# EAGLE board expansion_can_rev_B (EAGLE 6.6.0)
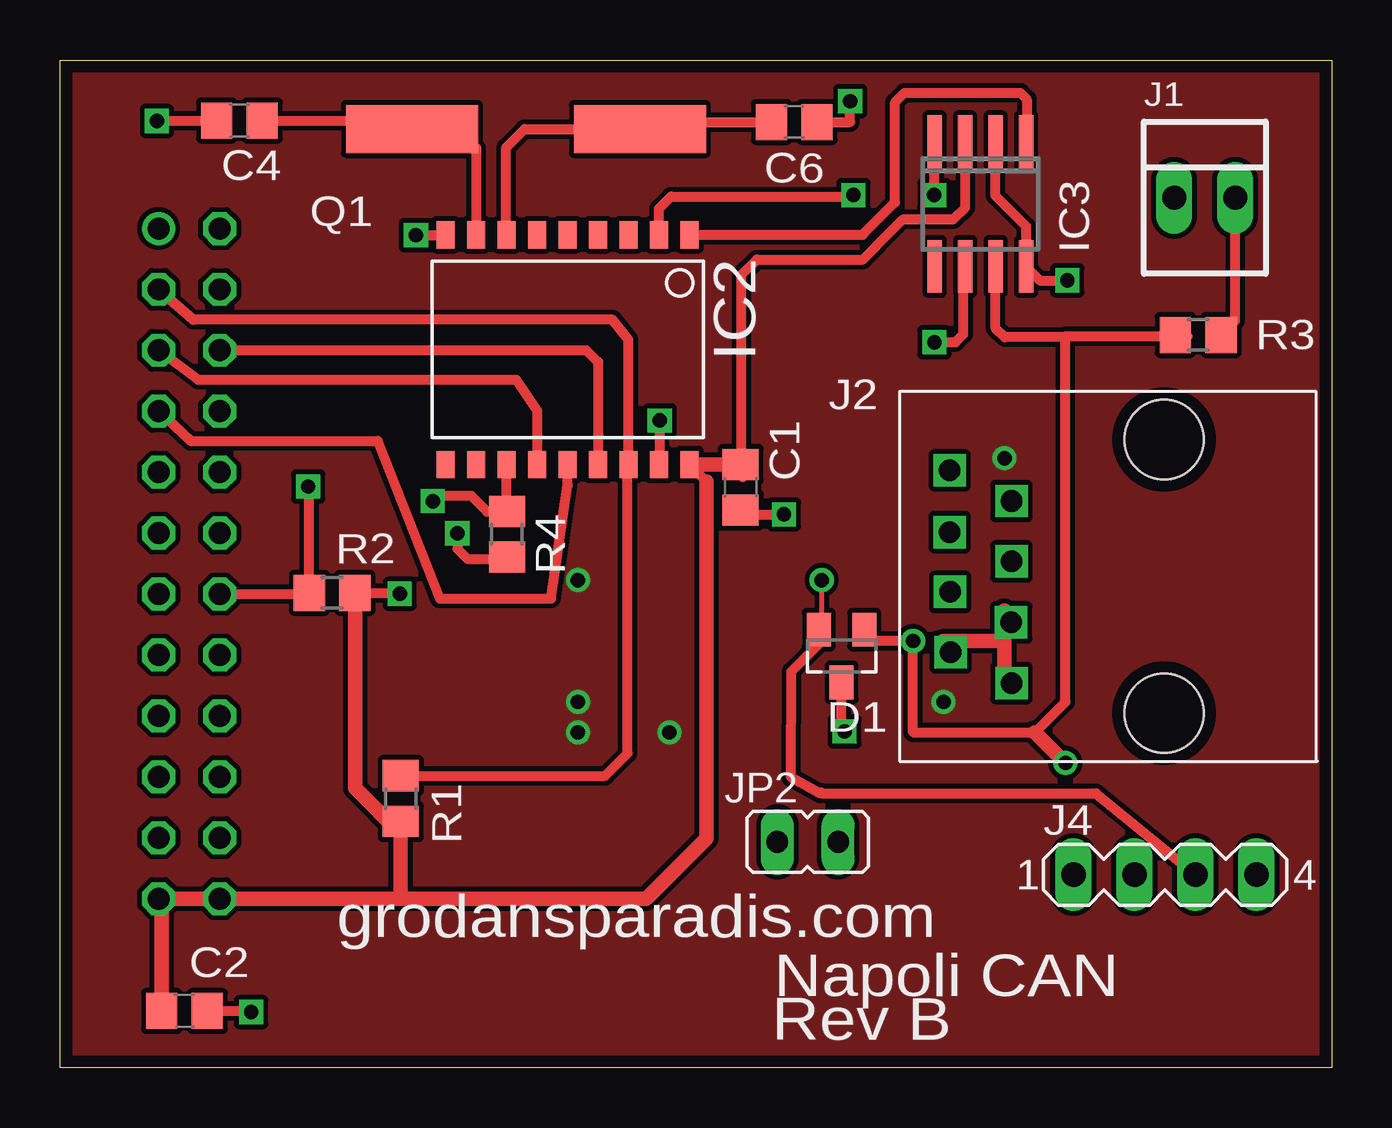
[diagram p0: board, top side]
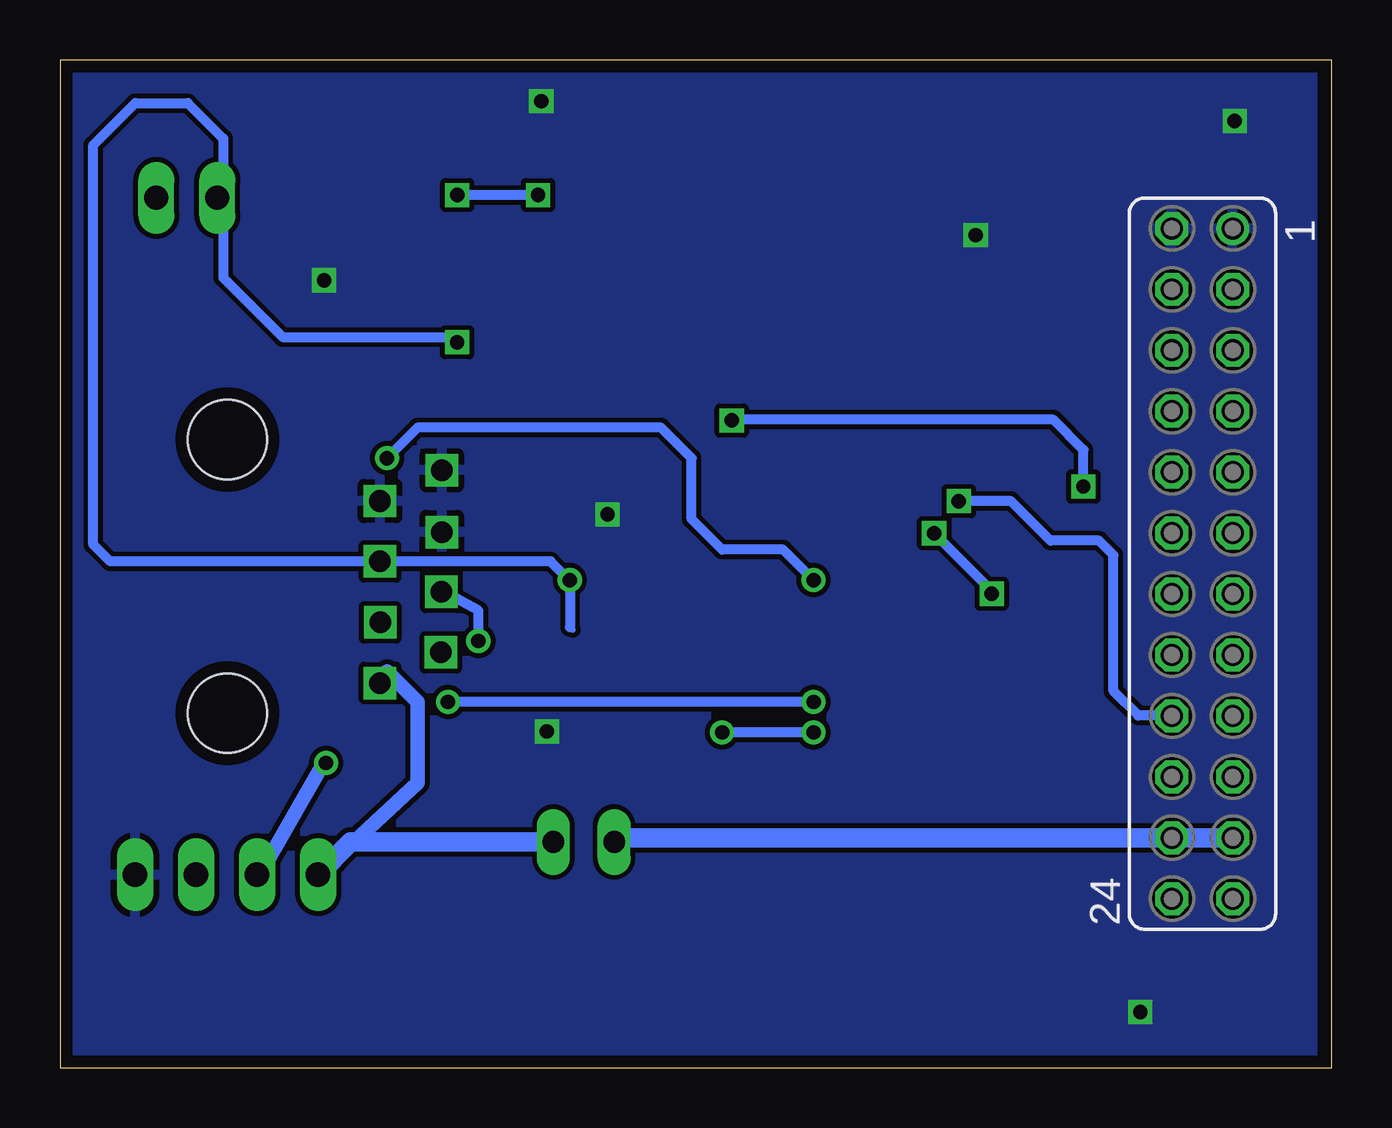
[diagram p1: board, bottom side, seen from below]

Size 53 x 42 mm. Coordinates in mm from the lower left corner, seen from the top.
Outline: 0,0 0,42 53,42 53,0 0,0
Copper layers (1*16): Top 0.035mm / dielectric 1.5mm / Bottom 0.035mm
Design rules "8mils": minimum track width 8mil, minimum drill 0.6mm, track to track 8mil, track to pad 8mil, pad to pad 8mil, via to via 8mil, smd to smd 0mil, copper to edge 20mil, drill to drill 10mil, minimum pad ring 8mil, minimum via ring 8mil, stop-mask expansion 0mil, vias tented up to drill 0mil, thermal gap 10mil

## Footprints (pad centres in the part's own frame; a part is rotated, then mirrored left to right if it is on the bottom)
C0805 = smd 1.3 x 1.5: 1 -0.95,0; 2 0.95,0
SOT23 = smd 1 x 1.4: 1 -0.95,-1.1; 2 0.95,-1.1; 3 0,1.1
SO-18W = smd 0.762 x 1.143: 1 -5.08,-4.788; 2 -3.81,-4.788; 3 -2.54,-4.788; 4 -1.27,-4.788; 5 0,-4.788; 6 1.27,-4.788; 7 2.54,-4.788; 8 3.81,-4.788; 9 5.08,-4.788; 10 5.08,4.788; 11 3.81,4.788; 12 2.54,4.788; 13 1.27,4.788; 14 0,4.788; 15 -1.27,4.788; 16 -2.54,4.788; 17 -3.81,4.788; 18 -5.08,4.788
SO-08 = smd 0.6 x 2.2: 1 -1.905,-2.6; 2 -0.635,-2.6; 3 0.635,-2.6; 4 1.905,-2.6; 5 1.905,2.6; 6 0.635,2.6; 7 -0.635,2.6; 8 -1.905,2.6
22-23-2021 = drill 1 long: 1 -1.27,0; 2 1.27,0
RJ-45 = drill 0.9 square: 1 -4.45,6.35; 2 -3.17,8.89; 3 -1.92,6.36; 4 -0.65,8.91; 5 0.62,6.35; 6 1.84,8.93; 7 3.14,6.35; 8 4.42,8.93 | hole 3.3: -5.7,0; 5.7,0
MA04-1 = drill 1.016 long: 1 -3.81,0; 2 -1.27,0; 3 1.27,0; 4 3.81,0
FE12-2 = drill 0.914: 1 -13.97,1.27 | drill 0.914 octagon: 2 -13.97,-1.27; 3 -11.43,1.27; 4 -11.43,-1.27; 5 -8.89,1.27; 6 -8.89,-1.27; 7 -6.35,1.27; 8 -6.35,-1.27; 9 -3.81,1.27; 10 -3.81,-1.27; 11 -1.27,1.27; 12 -1.27,-1.27; 13 1.27,1.27; 14 1.27,-1.27; 15 3.81,1.27; 16 3.81,-1.27; 17 6.35,1.27; 18 6.35,-1.27; 19 8.89,1.27; 20 8.89,-1.27; 21 11.43,1.27; 22 11.43,-1.27; 23 13.97,1.27; 24 13.97,-1.27
JP1 = drill 0.914 long: 1 0,-1.27; 2 0,1.27
9C = smd 5.5 x 2: P$1 -4.74,0; P$2 4.76,0
R0805 = smd 1.3 x 1.5: 1 -0.95,0; 2 0.95,0

## Placement (x,y rotation side)
C1  100nF  [C0805]  28.37,24.19 90 top
C2  100n  [C0805]  5.19,2.36 0 top
C4  15pF  [C0805]  7.48,39.47 0 top
C6  15pF  [C0805]  30.6,39.41 180 top
D1  NUP2105L  [SOT23]  32.58,17.15 180 top
IC2  MCP2515  [SO-18W]  21.16,29.92 180 top
IC3  SN65HVD232  [SO-08]  38.36,35.99 180 top
J1  22-23-2021  [22-23-2021]  47.72,36.26 0 top
J2  A00-108-220-450  [RJ-45]  46.01,20.48 90 top
J4  [MA04-1]  46.06,8.04 0 top
JP1  [FE12-2]  5.38,21.01 270 bottom
JP2  [JP1]  31.17,9.4 90 top
Q1  12 MHZ  [9C]  19.41,39.12 0 top
R1  10K  [R0805]  14.2,11.21 270 top
R2  10K  [R0805]  11.34,19.79 0 top
R3  120r  [R0805]  47.44,30.53 0 top
R4  10K  [R0805]  18.63,22.23 270 top

## Library data of the parts
C1 C2 C4 C6 R1-R4 = rcl
D1 = diode
IC2 J2 Q1 = vscpcan
IC3 = microchip_can
J1 = con-molex; MF: MOLEX; MPN: 22-23-2021; OC_FARNELL: 1462926; OC_NEWARK: 25C3832
J4 = con-lstb; OC_FARNELL: unknown; OC_NEWARK: unknown
JP1 = con-lsta; OC_FARNELL: unknown; OC_NEWARK: unknown
JP2 = jumper

## Nets
+3V3: C1.2 C2.1 IC2.18 IC3.3 JP1.23 JP1.24 R1.2 R2.2 R4.2
+12V: J2.1 J2.2 J2.3 J4.1 JP2.1
CAN_CS: IC2.16 JP1.3 R1.1
CAN_INT: IC2.12 JP1.18 R4.1
CAN_RESET: IC2.17 JP1.14 R2.1
CAN_SCK: IC2.13 JP1.5
CAN_SDI: IC2.14 JP1.7
CAN_SDO: IC2.15 JP1.6
CANH: D1.1 IC3.7 J2.4 J4.2 R3.1
CANL1: D1.2 IC3.6 J1.1 J2.5 J4.3
GND: C1.1 C2.2 C4.1 C6.1 D1.3 IC2.9 IC3.2 IC3.8 J2.6 J2.7 J2.8 J4.4 JP1.1 JP1.2
N$1: J1.2 R3.2
N$2: C4.2 IC2.8 Q1.P$1
N$7: C6.2 IC2.7 Q1.P$2
N$10: JP1.20
N$12: JP1.16
N$14: JP1.12
N$15: JP1.10
N$16: JP1.8
N$22: JP1.19
N$23: JP1.17
N$24: JP1.15
N$25: JP1.13
N$26: JP1.11
N$27: JP1.9
RXD: IC2.2 IC3.4
TXD: IC2.1 IC3.1
VIN: JP1.21 JP1.22 JP2.2
VREF: IC3.5

## Tracks (layer width: path | path; a pad name or v marks a point on that pad's centre or on a via)
+3V3  (via drill 0.6)
  Top 0.406: 4.24,7.04 JP1.23 | C1.2 28.45,25.05 28.45,24.61 28.41,24.66 28.41,33.04 29.05,33.69 33.48,33.69 34.01,34.22 34,34.22 35.14,35.35 37.23,35.35 37.73,35.85 IC3.3 | 26.95,24.43 IC2.18 | 14.2,9.74 R1.2 | 14.27,7.04 14.2,7.11 | R2.2 14.12,19.79 v14.16,19.75 | v16.56,22.27 16.56,21.62 16.98,21.2 18.56,21.2 R4.2
  Top 0.61: C2.1 4.24,7.04 | JP1.23 4.11,7.02 6.65,7.02 JP1.24 14.27,7.04 24.43,7.04 26.95,9.55 26.95,24.43 | IC2.18 C1.2 | 14.2,7.11 14.2,9.74 12.29,11.65 R2.2
  Bottom 0.406: v14.16,19.75 14.16,19.87 v16.56,22.27
+12V
  Top 0.203: J2.1 39.37,16.51
  Top 0.61: 39.37,17.78 36.83,17.78 J2.2 | 39.37,17.78 39.37,19.05 J2.3 | 39.37,16.51 39.37,17.78
  Bottom 0.203: J4.1 42.2,8.06
  Bottom 0.61: 42.2,8.06 38.1,11.87 38.1,15.24 39.37,16.51 J2.1
  Bottom 0.813: JP2.1 40.89,9.4 J4.1
CAN_CS
  Top 0.406: JP1.3 5.54,31.17 23.03,31.17 23.7,30.34 IC2.16 23.66,25.1 23.66,13.1 22.72,12.16 R1.1
CAN_INT  (via drill 0.6)
  Top 0.406: IC2.12 18.62,23.19 R4.1 17.8,23.18 17.14,23.84 15.76,23.84 v15.53,23.61
  Bottom 0.406: v15.53,23.61 13.36,23.61 11.72,21.97 9.7,21.97 9.08,21.36 9.08,15.7 8.05,14.67 6.66,14.67 JP1.18
CAN_RESET  (via drill 0.6)
  Top 0.406: JP1.14 10.34,19.74 R2.1 10.39,24.17 v10.34,24.22 | v25,26.97 25,25.17 IC2.17
  Bottom 0.406: v10.34,24.22 10.34,25.75 11.6,27.01 24.96,27.01 v25,26.97
CAN_SCK
  Top 0.406: IC2.13 19.89,27.38 19.02,28.67 5.75,28.67 JP1.5
CAN_SDI
  Top 0.406: IC2.14 21.16,24.28 20.47,19.54 15.83,19.54 13.24,26.11 5.44,26.11 JP1.7
CAN_SDO
  Top 0.406: IC2.15 22.43,29.41 21.93,29.9 JP1.6
CANH  (via drill 0.6)
  Top 0.203: 41.91,30.39 41.91,30.48 | 46.99,30.48 R3.1
  Top 0.406: 41.91,30.48 46.99,30.48 | D1.1 34,17.78 v35.56,17.78 35.56,13.97 40.64,13.97 41.91,15.24 41.91,30.39 41.86,30.44 39.38,30.44 39,30.82 IC3.7
  Top 0.61: 40.64,13.97 v41.91,12.7
  Bottom 0.203: v41.91,12.7 42.03,12.66 | 44.75,7.92 J4.2
  Bottom 0.406: v35.56,17.78 35.56,19.05 36.92,19.81 J2.4
  Bottom 0.61: 42.03,12.66 44.75,7.92
CANL1  (via drill 0.6)
  Top 0.203: v31.75,20.32 31.75,17.78 D1.2 | 47.37,8 J4.3
  Top 0.406: v36.45,30.24 37.33,30.24 37.65,30.57 37.65,33.32 IC3.6 | 47.37,8 43.18,11.43 31.75,11.43 31.75,11.46 31.68,11.43 30.47,12.1 30.48,16.51 31.75,17.78
  Bottom 0.203: v31.75,20.32 31.74,20.29
  Bottom 0.254: 31.74,18.36 D1.2
  Bottom 0.406: 31.74,18.36 31.74,20.29 32.55,21.1 J2.5 50.91,21.1 51.61,21.8 51.61,38.45 49.86,40.2 47.67,40.2 46.19,38.73 46.19,36.52 | 46.19,36.52 J1.1 | 46.19,36.52 46.19,32.92 43.73,30.45 36.67,30.45 v36.45,30.24
GND  (via drill 0.6)
  Top 0.406: C4.1 v4.04,39.47 v4.04,39.46 | C6.1 32.94,39.41 v32.94,40.28 | v41.99,32.81 40.85,32.81 IC3.8 40.27,35.06 39,36.33 IC3.2 | D1.3 32.58,14.46 v32.7,14.01 | C2.2 7.92,2.36 v7.97,2.31 | v14.84,34.7 16.06,34.7 IC2.9 | v30.18,23.06 28.55,23.06 C1.1
  pour Bottom: -0.45,42.56 0.79,42.32 0.79,0.4 53.28,0.4 53.28,0.56 54.23,0.56 54.23,42.71 0.56,42.96 -0.71,42.96
N$1
  Top 0.406: J1.2 48.99,31.13 R3.2
N$2
  Top 0.406: C4.2 14.67,39.47 Q1.P$1 14.69,39.15 16.53,39.15 17.35,38.33 IC2.8
N$3  (via drill 0.6)
  Bottom 0.406: v21.59,13.97 v25.4,13.97 | v21.59,15.24 v36.83,15.24 | v21.59,20.32 22.86,21.59 25.4,21.59 26.67,22.86 26.67,25.4 27.94,26.67 38.1,26.67 v39.37,25.4
  pour Top: 0.15,43.09 0.36,0.28 0.81,0.21 52.15,0.18 52.99,0.33 53.08,41.39 53.06,42.41
N$7
  Top 0.406: C6.2 24.17,39.41 Q1.P$2 19.37,39.12 18.6,38.35 18.6,34.73 IC2.7
RXD  (via drill 0.6)
  Top 0.406: IC2.2 24.97,35.8 25.47,36.3 33.01,36.3 v33.07,36.37 | v36.44,36.37 36.44,38.58 IC3.4
  Bottom 0.406: v33.07,36.37 v36.44,36.37
TXD
  Top 0.406: IC2.1 33.45,34.71 34.81,36.07 34.81,40.23 35.21,40.63 40.03,40.63 40.29,40.36 40.29,38.62 IC3.1
VIN
  Bottom 0.813: JP1.21 JP1.22 29.72,9.58 JP2.2

## Text on the board
tNames: grodansparadis.com | Napoli CAN | Rev B